# EAGLE board TO252_SOT89 (EAGLE 6.4)
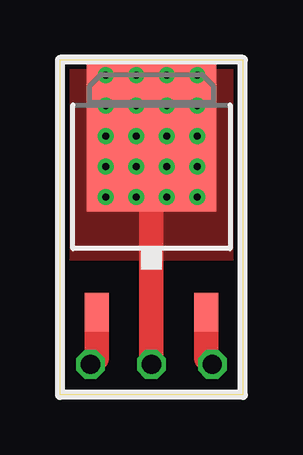
[diagram p0: board, top side]
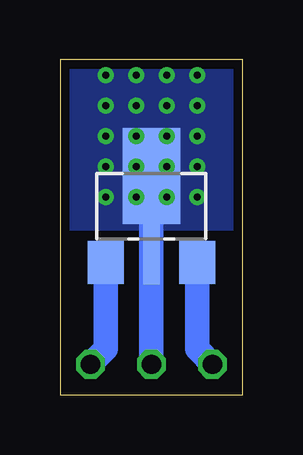
[diagram p1: board, bottom side, seen from below]

Size 7.62 x 13.97 mm. Coordinates in mm from the lower left corner, seen from the top.
Outline: 0,13.97 7.62,13.97 7.62,0 0,0 0,13.97
Copper layers (1*16): Top 0.0356mm / dielectric 1.5011mm / Bottom 0.0356mm
Design rules "oshpark": minimum track width 6mil, minimum drill 13mil, track to track 6mil, track to pad 6mil, pad to pad 6mil, via to via 6mil, smd to smd 6mil, copper to edge 15mil, drill to drill 6mil, minimum pad ring 7mil, minimum via ring 7mil, stop-mask expansion 4mil, vias tented up to drill 0mil, thermal gap 10mil
Net classes: 1 pwr: width 0.254 mm

## Footprints (pad centres in the part's own frame; a part is rotated, then mirrored left to right if it is on the bottom)
SOT89-W = smd 1.5 x 1.8: 1 1.9,-2.1; 2 -1.9,-2.1 | smd 2.4 x 4: 3 0,1.5 | smd 0.7 x 2.55: 4 0,-1.73
1 = drill 0.8 octagon: P$1 0,0
TO252 = smd 1 x 1.6: 1 -2.28,-4.8; 2 2.28,-4.8 | smd 5.4 x 6.2: 3 0,2.5

## Placement (x,y rotation side)
E$54  [SOT89-W]  3.81,7.62 0 bottom
E$69  [1]  1.27,1.27 270 top
E$73  [1]  6.35,1.27 270 top
E$93  [1]  3.81,1.27 270 top
E$632  [TO252]  3.81,8.26 0 top

## Library data of the parts
E$54 = ref-packages
E$69 E$73 E$93 = drill
E$632 = ref-packages-longpad

## Nets
S$306 [pwr]: E$54.3 E$54.4 E$93.P$1 E$632.3
S$307 [pwr]: E$54.2 E$73.P$1 E$632.2
S$308 [pwr]: E$54.1 E$69.P$1 E$632.1

## Tracks (layer width: path | path; a pad name or v marks a point on that pad's centre or on a via)
S$306  (via drill 0.3)
  Top 1.016: v3.17,9.53 3.81,9.53 E$93.P$1
  Bottom 0.254: 3.81,8.89 v4.45,8.26 | E$54.3 3.81,8.89 | 3.81,8.89 v3.17,8.26
  Bottom 1.016: E$93.P$1 E$54.3
  other vias: 5.71,8.26 4.45,9.53 4.45,10.79 3.17,10.79 1.91,8.26 1.91,9.53 1.91,10.79 5.71,9.53 5.71,10.79 5.71,12.06 4.45,12.06 3.17,12.06 1.91,12.06 1.91,13.34 3.17,13.34 4.45,13.34 5.71,13.34
  pour Top (no thermals): 7.62,13.97 7.62,5.71 0,5.71 0,13.97
  pour Bottom (no thermals): 7.62,13.97 7.62,6.99 0,6.99 0,13.97
S$307
  Top 1.016: E$632.2 6.09,1.53 E$73.P$1
  Bottom 1.016: E$54.2 5.71,1.91 E$73.P$1
S$308
  Top 1.016: E$632.1 1.53,1.53 E$69.P$1
  Bottom 1.016: E$54.1 1.91,1.91 E$69.P$1